# Altium PCB DAQ_Board.PcbDoc
Units mil, origin at the board's own origin, x right, y up, seen from the top; angles counter-clockwise.
Board outline 8000 x 3250 mil, 4 copper layers (Top Layer, Mid-Layer 1, Mid-Layer 2, Bottom Layer); 86 components, 83 nets, 318 pads, 0 vias.
Unrouted connection lines stored in the file: 233.
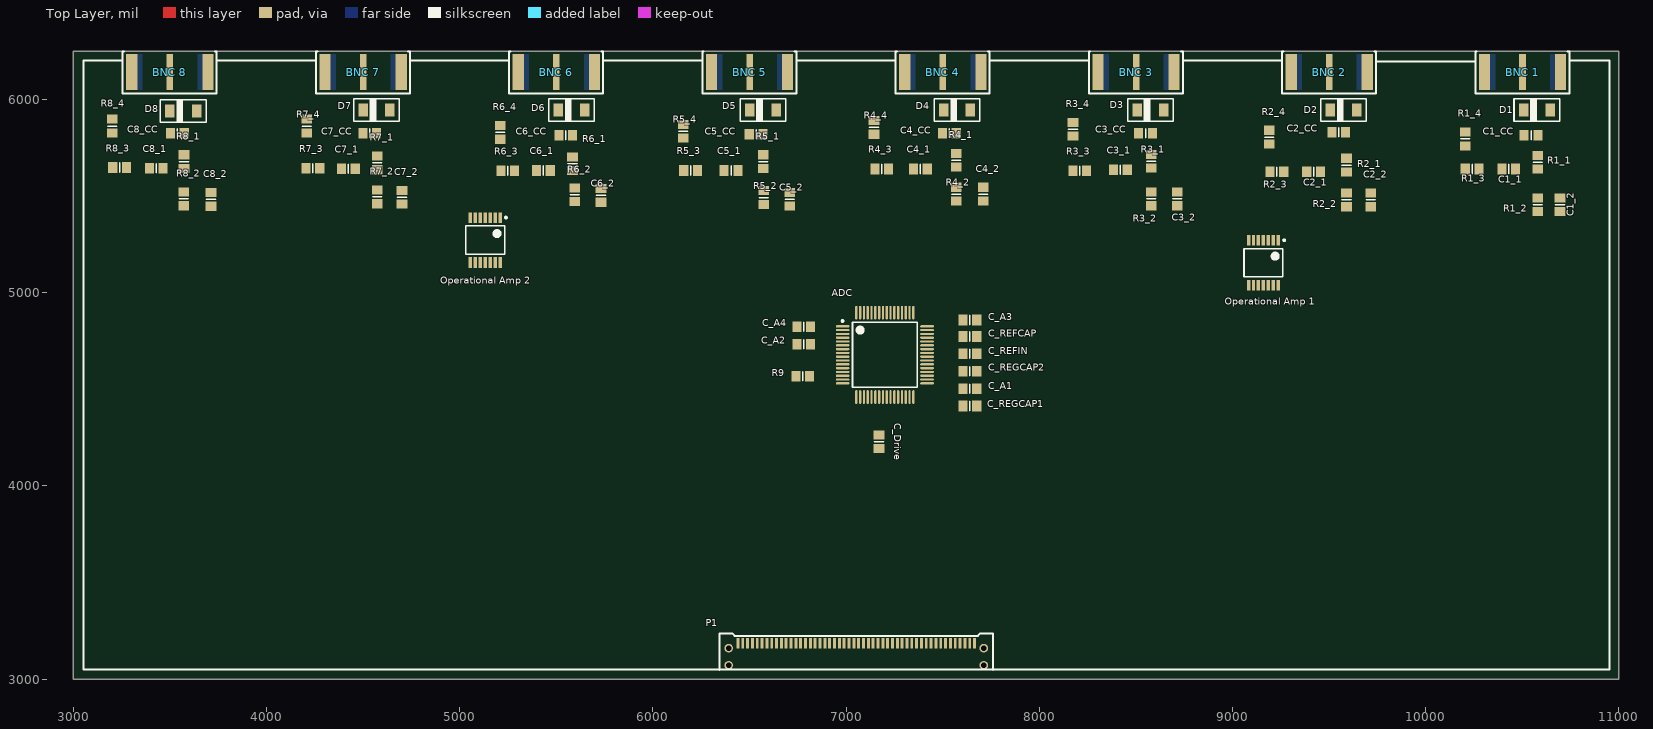
[diagram p0: Top Layer view]
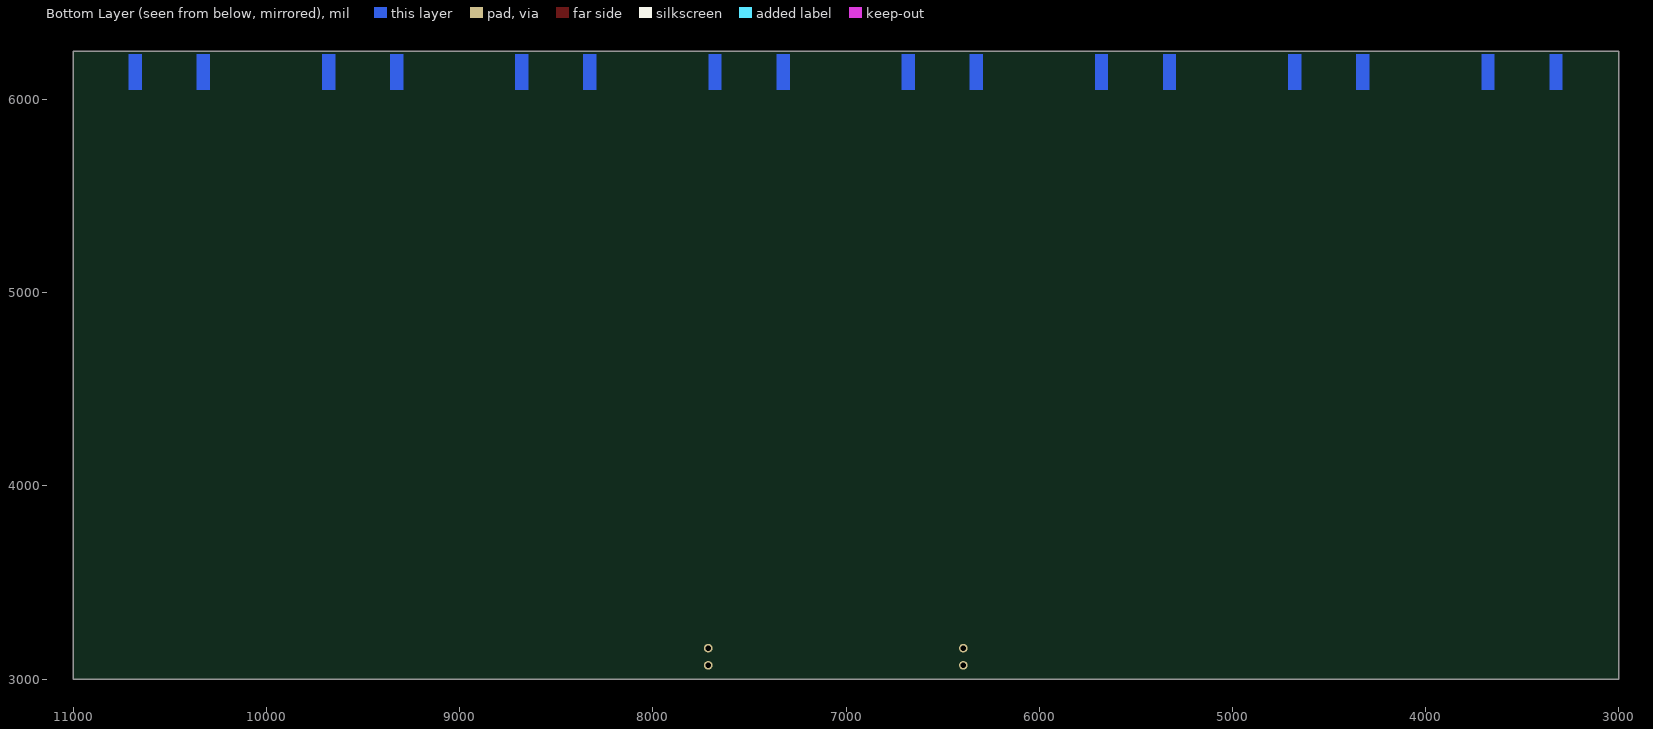
[diagram p1: Bottom Layer view, seen from below]

## Layer stack, top to bottom
Top Solder: solder mask 0.4, Solder Resist, Dk 3.5
Top Layer: signal copper 1.4
Dielectric 1: dielectric 12.6, FR-4, Dk 4.8
Mid-Layer 1: signal copper 1.4
Dielectric2: dielectric 12.6, FR-4, Dk 4.8
Mid-Layer 2: signal copper 1.4
Dielectric3: dielectric 12.6, FR-4, Dk 4.8
Bottom Layer: signal copper 1.4
Bottom Solder: solder mask 0.4, Solder Resist, Dk 3.5

## Board outline
3000,3000 11000,3000 11000,6250 3000,6250

## Design rules (kind name [scope] priority, off if disabled: settings)
Clearance [All] p1: gap=8
PolygonConnect [All] p1: connectstyle=Relief reliefconductorwidth=10 reliefentries=4 polygonreliefangle="90 Angle" airgapwidth=10
RoomDefinition "Low Pass Filter" [InComponentClass('Low Pass Filter')] p1: confinementstyle=ConfineIn formatcopy=TRUE lockcomponents=FALSE outline 3000,4982 11005,4982 11005,5755.43 3000,5755.43
RoomDefinition "DAQ Connector" [InComponentClass('DAQ Connector')] p2: confinementstyle=ConfineIn formatcopy=TRUE lockcomponents=FALSE outline 7843,2821 7843,3246 6163,3246 6163,2821
RoomDefinition "Charge Amp" [InComponentClass('Charge Amp')] p3: confinementstyle=ConfineIn formatcopy=TRUE lockcomponents=FALSE outline 3005,5760 10995,5760 10995,6754 3005,6754
RoomDefinition "Analog to Digital Con" [InComponentClass('Analog to Digital Con')] p4: confinementstyle=ConfineIn formatcopy=TRUE lockcomponents=FALSE outline 6536,4133 8071,4133 8071,5028 6536,5028
RoutingVias [All] p1: holewidth=10 width=25 viastyle="Through Hole" minholewidth=28 minwidth=50 maxholewidth=28 maxwidth=50
SolderMaskExpansion [All] p1: expansion=4
Width [All] p1: maxlimit=8 minlimit=8 preferedwidth=8
30 further rules are at their usual default settings.

## Classes and differential pairs
component class "Low Pass Filter": C1_1 C1_2 C2_1 C2_2 C3_1 C3_2 C4_1 C4_2 C5_1 C5_2 C6_1 C6_2 C7_1 C7_2 C8_1 C8_2 "Operational Amp 1" "Operational Amp 2" R1_1 R1_2 R1_3 R1_4 R2_1 R2_2 R2_3 R2_4 R3_1 R3_2 R3_3 R3_4 R4_1 R4_2 R4_3 R4_4 R5_1 R5_2 R5_3 R5_4 R6_1 R6_2 R6_3 R6_4 R7_1 R7_2 R7_3 R7_4 R8_1 R8_2 R8_3 R8_4
component class "DAQ Connector": P1
component class "Charge Amp": "BNC 1" "BNC 2" "BNC 3" "BNC 4" "BNC 5" "BNC 6" "BNC 7" "BNC 8" C1_CC C2_CC C3_CC C4_CC C5_CC C6_CC C7_CC C8_CC D1 D2 D3 D4 D5 D6 D7 D8
component class "Analog to Digital Con": ADC C_A1 C_A2 C_A3 C_A4 C_Drive C_REFCAP C_REFIN C_REGCAP1 C_REGCAP2 R9

## Components (designator, comment, footprint, x,y, rotation, side; value= is the part's Value field where it differs from the comment)
ADC "AD7606BSTZ" ST-64-2_N 7201,4678 r0 top
"BNC 1" "Component_1" "BNC 50OHM EDGE ACX2259" 10500,6145 r0 top
"BNC 2" "Component_1" "BNC 50OHM EDGE ACX2259" 9500,6145 r0 top
"BNC 3" "Component_1" "BNC 50OHM EDGE ACX2259" 8500,6145 r0 top
"BNC 4" "Component_1" "BNC 50OHM EDGE ACX2259" 7500,6145 r0 top
"BNC 5" "Component_1" "BNC 50OHM EDGE ACX2259" 6500,6145 r0 top
"BNC 6" "Component_1" "BNC 50OHM EDGE ACX2259" 5500,6145 r0 top
"BNC 7" "Component_1" "BNC 50OHM EDGE ACX2259" 4500,6145 r0 top
"BNC 8" "Component_1" "BNC 50OHM EDGE ACX2259" 3500,6145 r0 top
C1_1 "Cap Semi" 6-0805_N 10430,5640 r0 top
C1_2 "Cap Semi" 6-0805_N 10695,5455 r270 top
C1_CC "Coupling Cap" 6-0805_N 10545,5815 r0 top
C2_1 "Cap Semi" 6-0805_N 9420,5625 r180 top
C2_2 "Cap Semi" 6-0805_N 9715,5480 r90 top
C2_CC "Coupling Cap" 6-0805_N 9550,5830 r0 top
C3_1 "Cap Semi" 6-0805_N 8420,5635 r180 top
C3_2 "Cap Semi" 6-0805_N 8715,5485 r270 top
C3_CC "Coupling Cap" 6-0805_N 8550,5825 r0 top
C4_1 "Cap Semi" 6-0805_N 7385,5640 r0 top
C4_2 "Cap Semi" 6-0805_N 7710,5510 r270 top
C4_CC "Coupling Cap" 6-0805_N 7535,5825 r0 top
C5_1 "Cap Semi" 6-0805_N 6405,5632 r0 top
C5_2 "Cap Semi" 6-0805_N 6709,5483 r90 top
C5_CC "Coupling Cap" 6-0805_N 6535,5820 r0 top
C6_1 "Cap Semi" 6-0805_N 5434,5632 r180 top
C6_2 "Cap Semi" 6-0805_N 5732,5503 r90 top
C6_CC "Coupling Cap" 6-0805_N 5550,5815 r0 top
C7_1 "Cap Semi" 6-0805_N 4425,5641 r180 top
C7_2 "Cap Semi" 6-0805_N 4702,5493 r270 top
C7_CC "Coupling Cap" 6-0805_N 4535,5825 r0 top
C8_1 "Cap Semi" 6-0805_N 3431,5643 r180 top
C8_2 "Cap Semi" 6-0805_N 3714,5482 r270 top
C8_CC "Coupling Cap" 6-0805_N 3540,5825 r0 top
C_A1 "Decoupling Cap" 6-0805_N 7641,4503 r0 top
C_A2 "Decoupling Cap" 6-0805_N 6781,4733 r180 top
C_A3 "Decoupling Cap" 6-0805_N 7641,4858 r0 top
C_A4 "Decoupling Cap" 6-0805_N 6781,4823 r180 top
C_Drive "Decoupling Cap" 6-0805_N 7171,4228 r270 top
C_REFCAP "Decoupling Cap" 6-0805_N 7641,4773 r180 top
C_REFIN "Decoupling Cap" 6-0805_N 7641,4683 r180 top
C_REGCAP1 "Decoupling Cap" 6-0805_N 7641,4413 r180 top
C_REGCAP2 "Decoupling Cap" 6-0805_N 7641,4593 r180 top
D1 "CR Diode" "CR DIODE - DUPLICATE1" 10575,5945 r180 top
D2 "CR Diode" "CR DIODE - DUPLICATE1" 9575,5945 r180 top
D3 "CR Diode" "CR DIODE - DUPLICATE1" 8575,5945 r180 top
D4 "CR Diode" "CR DIODE - DUPLICATE1" 7575,5945 r180 top
D5 "CR Diode" "CR DIODE - DUPLICATE1" 6570,5945 r180 top
D6 "CR Diode" "CR DIODE - DUPLICATE1" 5580,5945 r180 top
D7 "CR Diode" "CR DIODE - DUPLICATE1" 4570,5945 r180 top
D8 "CR Diode" "CR DIODE - DUPLICATE1" 3570,5940 r180 top
"Operational Amp 1" "IC OPAMP 14TSSOP" TSV994IPT 9160,5155 r270 top
"Operational Amp 2" "IC OPAMP 14TSSOP" TSV994IPT 5133,5272 r270 top
P1 "SFM-125-02-X-DH" SFM-125-02-X-DH 7053,3026 r180 top
R1_1 "Res3" 6-0805_N 10580,5675 r270 top
R1_2 "Res3" 6-0805_N 10580,5455 r90 top
R1_3 "Res3" 6-0805_N 10240,5640 r180 top
R1_4 "Res3" 6-0805_N 10205,5795 r90 top
R2_1 "Res3" 6-0805_N 9590,5660 r270 top
R2_2 "Res3" 6-0805_N 9590,5480 r270 top
R2_3 "Res3" 6-0805_N 9230,5625 r0 top
R2_4 "Res3" 6-0805_N 9190,5805 r270 top
R3_1 "Res3" 6-0805_N 8580,5680 r90 top
R3_2 "Res3" 6-0805_N 8580,5485 r270 top
R3_3 "Res3" 6-0805_N 8210,5630 r0 top
R3_4 "Res3" 6-0805_N 8175,5845 r270 top
R4_1 "Res3" 6-0805_N 7570,5685 r270 top
R4_2 "Res3" 6-0805_N 7570,5510 r90 top
R4_3 "Res3" 6-0805_N 7185,5640 r180 top
R4_4 "Res3" 6-0805_N 7145,5855 r90 top
R5_1 "Res3" 6-0805_N 6571,5678 r270 top
R5_2 "Res3" 6-0805_N 6574,5492 r90 top
R5_3 "Res3" 6-0805_N 6196,5632 r180 top
R5_4 "Res3" 6-0805_N 6157,5835 r90 top
R6_1 "Res3" 6-0805_N 5585,5667 r270 top
R6_2 "Res3" 6-0805_N 5597,5506 r270 top
R6_3 "Res3" 6-0805_N 5250,5630 r0 top
R6_4 "Res3" 6-0805_N 5210,5829 r270 top
R7_1 "Res3" 6-0805_N 4575,5671 r270 top
R7_2 "Res3" 6-0805_N 4575,5495 r270 top
R7_3 "Res3" 6-0805_N 4241,5644 r0 top
R7_4 "Res3" 6-0805_N 4209,5862 r90 top
R8_1 "Res3" 6-0805_N 3574,5678 r270 top
R8_2 "Res3" 6-0805_N 3572,5485 r90 top
R8_3 "Res3" 6-0805_N 3241,5647 r180 top
R8_4 "Res3" 6-0805_N 3203,5862 r90 top
R9 "Res3" 6-0805_N 6776,4568 r0 top

## Footprints (in the part's own frame and the unit in brackets; to place one, negate y for a bottom-side part, rotate by r counter-clockwise, add the part's x,y. Pads: shape width x height; smd on the part's side, far side on the other; paste and mask are expansions set on the pad)
6-0805_N [mm] "Chip Resistor, Body 2.0x1.2mm, IPC Medium Density"
  rect 1.2x1.4 smd: 1(-0.9,0) 2(0.9,0)
  silkscreen extent 0,-0.6 0,0.6, body extent -1.07,-0.7 1.07,0.7, height 0.7
"BNC 50OHM EDGE ACX2259" [mil]
  rect 34x186 smd: 1(1,-4)
  rect 58x186 smd: g1(-196,-4) g2(198,-4)
  Bottom Layer region: -209,-97 -140,-97 -140,89 -209,89
  Bottom Layer region: 143,-97 212,-97 212,89 143,89
  silkscreen extent -243,-114 243,103, body extent -220,-71 213,597, height 232
"CR DIODE - DUPLICATE1" [mm]
  rect 1.25x1.75 smd: A(-1.75,0) K(1.75,0)
  silkscreen extent -3,-1.5 3,1.5
SFM-125-02-X-DH [mil]
  rect 15x55 smd mask+2: 1(-612.5,-159.5) 2(-587.5,-159.5) 3(-562.5,-159.5) 4(-537.5,-159.5) 5(-512.5,-159.5) 6(-487.5,-159.5) 7(-462.5,-159.5) 8(-437.5,-159.5) 9(-412.5,-159.5) 10(-387.5,-159.5) 11(-362.5,-159.5) 12(-337.5,-159.5) 13(-312.5,-159.5) 14(-287.5,-159.5) 15(-262.5,-159.5) 16(-237.5,-159.5) 17(-212.5,-159.5) 18(-187.5,-159.5) 19(-162.5,-159.5) 20(-137.5,-159.5) 21(-112.5,-159.5) 22(-87.5,-159.5) 23(-62.5,-159.5) 24(-37.5,-159.5) 25(-12.5,-159.5) 26(12.5,-159.5) 27(37.5,-159.5) 28(62.5,-159.5) 29(87.5,-159.5) 30(112.5,-159.5) 31(137.5,-159.5) 32(162.5,-159.5) 33(187.5,-159.5) 34(212.5,-159.5) 35(237.5,-159.5) 36(262.5,-159.5) 37(287.5,-159.5) 38(312.5,-159.5) 39(337.5,-159.5) 40(362.5,-159.5) 41(387.5,-159.5) 42(412.5,-159.5) 43(437.5,-159.5) 44(462.5,-159.5) 45(487.5,-159.5) 46(512.5,-159.5) 47(537.5,-159.5) 48(562.5,-159.5) 49(587.5,-159.5) 50(612.5,-159.5)
  round 45 hole 28 mask+3: G1(-660,-45) G2(-660,-134) G3(660,-45) G4(660,-134)
  silkscreen extent -708,-210 708,-20, body extent -687,-190 688,195, height 200
ST-64-2_N [mm] "Thin QFP, 64-Leads, Body 10x10mm, Pitch 0.5mm, IPC Medium Density"
  oval 1.8x0.3 smd: 1(-5.55,3.75) 2(-5.55,3.25) 3(-5.55,2.75) 4(-5.55,2.25) 5(-5.55,1.75) 6(-5.55,1.25) 7(-5.55,0.75) 8(-5.55,0.25) 9(-5.55,-0.25) 10(-5.55,-0.75) 11(-5.55,-1.25) 12(-5.55,-1.75) 13(-5.55,-2.25) 14(-5.55,-2.75) 15(-5.55,-3.25) 16(-5.55,-3.75) 33(5.55,-3.75) 34(5.55,-3.25) 35(5.55,-2.75) 36(5.55,-2.25) 37(5.55,-1.75) 38(5.55,-1.25) 39(5.55,-0.75) 40(5.55,-0.25) 41(5.55,0.25) 42(5.55,0.75) 43(5.55,1.25) 44(5.55,1.75) 45(5.55,2.25) 46(5.55,2.75) 47(5.55,3.25) 48(5.55,3.75)
  oval 0.3x1.8 smd: 17(-3.75,-5.55) 18(-3.25,-5.55) 19(-2.75,-5.55) 20(-2.25,-5.55) 21(-1.75,-5.55) 22(-1.25,-5.55) 23(-0.75,-5.55) 24(-0.25,-5.55) 25(0.25,-5.55) 26(0.75,-5.55) 27(1.25,-5.55) 28(1.75,-5.55) 29(2.25,-5.55) 30(2.75,-5.55) 31(3.25,-5.55) 32(3.75,-5.55) 49(3.75,5.55) 50(3.25,5.55) 51(2.75,5.55) 52(2.25,5.55) 53(1.75,5.55) 54(1.25,5.55) 55(0.75,5.55) 56(0.25,5.55) 57(-0.25,5.55) 58(-0.75,5.55) 59(-1.25,5.55) 60(-1.75,5.55) 61(-2.25,5.55) 62(-2.75,5.55) 63(-3.25,5.55) 64(-3.75,5.55)
  silkscreen extent -5.67,-4.25 4.25,4.57, body extent -5,-5 5,5, height 1.6
TSV994IPT [mm] "TSOP, 14-Leads, Body 5.00x4.40mm, Pitch 0.65mm, IPC Medium Density"
  rect 1.4x0.45 smd: 1(-2.95,1.95) 2(-2.95,1.3) 3(-2.95,0.65) 4(-2.95,0) 5(-2.95,-0.65) 6(-2.95,-1.3) 7(-2.95,-1.95) 8(2.95,-1.95) 9(2.95,-1.3) 10(2.95,-0.65) 11(2.95,0) 12(2.95,0.65) 13(2.95,1.3) 14(2.95,1.95)
  silkscreen extent -3.07,-2.55 1.85,2.85, body extent -2.25,-2.55 2.25,2.55, height 1.2

## Part data
ADC: "8 Channel Data Acquisition System with 16-Bit, Bipolar Input, Simultaneous Sampling Analog-to-Digital Converter with Parallel, Serial and SPI Interface, 200KSPS, -40 to +85 degC, ST-64-2, Pb-Free, Tray"
"BNC 1" "BNC 2" "BNC 3" "BNC 4" "BNC 5" "BNC 6" "BNC 7" "BNC 8": "CONN BNC JACK 50 OHM EDGE MNT"
C1_1 C1_2 C2_1 C2_2 C3_1 C3_2 C4_1 C4_2 C5_1 C5_2 C6_1 C6_2 C7_1 C7_2 C8_1 C8_2: "Capacitor (Semiconductor SIM Model)"
C1_CC C2_CC C3_CC C4_CC C5_CC C6_CC C7_CC C8_CC C_A1 C_A2 C_A3 C_A4 C_Drive C_REFCAP C_REFIN C_REGCAP1 C_REGCAP2: library part "Cap Semi", "Capacitor (Semiconductor SIM Model)"
D1 D2 D3 D4 D5 D6 D7 D8: library part Diode_1, "Current Regulator Diodes 100V 2mA"
"Operational Amp 1" "Operational Amp 2": library part Component_1
P1: ".050\" (1,27mm) Tiger Eye Contact, Molded-to-Position Socket Strip, Double Horizontal."
R1_1 R1_2 R1_3 R1_4 R2_1 R2_2 R2_3 R2_4 R3_1 R3_2 R3_3 R3_4 R4_1 R4_2 R4_3 R4_4 R5_1 R5_2 R5_3 R5_4 R6_1 R6_2 R6_3 R6_4 R7_1 R7_2 R7_3 R7_4 R8_1 R8_2 R8_3 R8_4 R9: "Resistor"

## Nets (pads, with @x,y where several pads share a name; then routed paths per layer and width w, separated by ;. In a path a pad name is that pad's centre, name@x,y a point inside that pad or via, vN(x,y) a via of type N, cw(c..) or ccw(c..) an arc to the next point about the centre after c; other vN are vias at no path point)
2V5REF: ADC.42 C_REFIN.2 P1.50
3V3: ADC.23 C_Drive.1 P1.11 P1.12
5V: ADC.1 ADC.37 ADC.38 ADC.48 C_A1.1 C_A2.1 C_A3.1 C_A4.1 P1.5 P1.6 P1.7 P1.8
5VDC: "Operational Amp 1.4" "Operational Amp 2.4"
24V: D1.A D2.A D3.A D4.A D5.A D6.A D7.A D8.A P1.1 P1.2 P1.3 P1.4
-5VDC: "Operational Amp 1.11" "Operational Amp 2.11"
BCN_IN1: "BNC 1.1" C1_CC.1 D1.K
CONVAB: ADC.9 ADC.10 P1.18
CS: ADC.13 P1.15
DATA0: ADC.16 P1.47
DATA1: ADC.17 P1.45
DATA2: ADC.18 P1.43
DATA3: ADC.19 P1.41
DATA4: ADC.20 P1.39
DATA5: ADC.21 P1.37
DATA6: ADC.22 P1.35
DATA7: ADC.24 P1.33
DATA8: ADC.25 P1.31
DATA9: ADC.27 P1.29
DATA10: ADC.28 P1.27
DATA11: ADC.29 P1.25
DATA12: ADC.30 P1.23
DATA13: ADC.31 P1.21
DATA14: ADC.32 P1.19
DATA15: ADC.33 P1.17
FRSTDATAA: ADC.15 P1.14
GND: "BNC 1.g1" "BNC 1.g2" "BNC 2.g1" "BNC 2.g2" "BNC 3.g1" "BNC 3.g2" "BNC 4.g1" "BNC 4.g2" "BNC 5.g1" "BNC 5.g2" "BNC 6.g1" "BNC 6.g2" "BNC 7.g1" "BNC 7.g2" "BNC 8.g1" "BNC 8.g2" ADC.2 ADC.3 ADC.4 ADC.5 ADC.6 ADC.8 ADC.26 ADC.34 ADC.35 ADC.40 ADC.41 ADC.43 ADC.46 ADC.47 ADC.50 ADC.52 ADC.54 ADC.56 ADC.58 ADC.60 ADC.62 ADC.64 C1_2.1 C2_2.2 C3_2.1 C4_2.1 C5_2.2 C6_2.2 C7_2.1 C8_2.1 C_A1.2 C_A2.2 C_A3.2 C_A4.2 C_Drive.2 C_REFCAP.1 C_REFIN.1 C_REGCAP1.1 C_REGCAP2.1 R1_4.2 R2_4.1 R3_4.1 R4_4.2 R5_4.2 R6_4.1 R7_4.1 R8_4.2 R9.1
N5V: P1.9 P1.10
NetADC_14: ADC.14 R9.2
NetADC_36: ADC.36 C_REGCAP1.2
NetADC_39: ADC.39 C_REGCAP2.2
NetADC_44: ADC.44 ADC.45 C_REFCAP.2
"NetBNC 2_1": "BNC 2.1" C2_CC.1 D2.K
"NetBNC 3_1": "BNC 3.1" C3_CC.1 D3.K
"NetBNC 4_1": "BNC 4.1" C4_CC.1 D4.K
"NetBNC 5_1": "BNC 5.1" C5_CC.1 D5.K
"NetBNC 6_1": "BNC 6.1" C6_CC.1 D6.K
"NetBNC 7_1": "BNC 7.1" C7_CC.1 D7.K
"NetBNC 8_1": "BNC 8.1" C8_CC.1 D8.K
NetC1_1_2: C1_1.2 R1_1.2 R1_2.2
NetC1_2_2: "Operational Amp 1.12" C1_2.2 R1_2.1
NetC1_CC_2: C1_CC.2 R1_1.1
NetC2_1_1: C2_1.1 R2_1.2 R2_2.1
NetC2_2_1: "Operational Amp 1.3" C2_2.1 R2_2.2
NetC2_CC_2: C2_CC.2 R2_1.1
NetC3_1_1: C3_1.1 R3_1.2 R3_2.1
NetC3_2_2: "Operational Amp 1.5" C3_2.2 R3_2.2
NetC3_CC_2: C3_CC.2 R3_1.1
NetC4_1_2: C4_1.2 R4_1.2 R4_2.2
NetC4_2_2: "Operational Amp 1.10" C4_2.2 R4_2.1
NetC4_CC_2: C4_CC.2 R4_1.1
NetC5_1_2: C5_1.2 R5_1.2 R5_2.2
NetC5_2_1: "Operational Amp 2.12" C5_2.1 R5_2.1
NetC5_CC_2: C5_CC.2 R5_1.1
NetC6_1_1: C6_1.1 R6_1.2 R6_2.1
NetC6_2_1: "Operational Amp 2.3" C6_2.1 R6_2.2
NetC6_CC_2: C6_CC.2 R6_1.1
NetC7_1_1: C7_1.1 R7_1.2 R7_2.1
NetC7_2_2: "Operational Amp 2.5" C7_2.2 R7_2.2
NetC7_CC_2: C7_CC.2 R7_1.1
NetC8_1_1: C8_1.1 R8_1.2 R8_2.2
NetC8_2_2: "Operational Amp 2.10" C8_2.2 R8_2.1
NetC8_CC_2: C8_CC.2 R8_1.1
"NetOperational Amp 1_2": "Operational Amp 1.2" R2_3.1 R2_4.2
"NetOperational Amp 1_6": "Operational Amp 1.6" R3_3.1 R3_4.2
"NetOperational Amp 1_9": "Operational Amp 1.9" R4_3.2 R4_4.1
"NetOperational Amp 1_13": "Operational Amp 1.13" R1_3.2 R1_4.1
"NetOperational Amp 2_2": "Operational Amp 2.2" R6_3.1 R6_4.2
"NetOperational Amp 2_6": "Operational Amp 2.6" R7_3.1 R7_4.2
"NetOperational Amp 2_9": "Operational Amp 2.9" R8_3.2 R8_4.1
"NetOperational Amp 2_13": "Operational Amp 2.13" R5_3.2 R5_4.1
NetP1_22: P1.22 P1.24 P1.26 P1.28 P1.30 P1.32 P1.34 P1.36 P1.38 P1.40 P1.42 P1.44 P1.46 P1.G1 P1.G2 P1.G3 P1.G4
OUT1: "Operational Amp 1.14" ADC.49 C1_1.1 R1_3.1
OUT2: "Operational Amp 1.1" ADC.51 C2_1.2 R2_3.2
OUT3: "Operational Amp 1.7" ADC.53 C3_1.2 R3_3.2
OUT4: "Operational Amp 1.8" ADC.55 C4_1.1 R4_3.1
OUT5: "Operational Amp 2.14" ADC.57 C5_1.1 R5_3.1
OUT6: "Operational Amp 2.1" ADC.59 C6_1.2 R6_3.2
OUT7: "Operational Amp 2.7" ADC.61 C7_1.2 R7_3.2
OUT8: "Operational Amp 2.8" ADC.63 C8_1.2 R8_3.1
RD: ADC.12 P1.13
RESET: ADC.11 P1.16
STBY: ADC.7 P1.20
pads on no net: P1.48 P1.49

## Silkscreen, mask and mechanical layers (free items; w line width, h text height)
Top Overlay:
  lines w10: 3257,6200 3055,6200 3055,3050 10950,3050 10950,6200 10745,6200 ; 3743,6200 4257,6200 ; 4743,6200 5257,6200 ; 5743,6200 6257,6200 ; 6743,6200 7257,6200 ; 7743,6200 8257,6200 ; 8743,6200 9257,6200 ; 9743,6195 10257,6195

## Text inside footprints (layer, text, board x,y; h text height)
P1: Mechanical 1 "J1" at 7072.57,3096 h30 r180